# Altium PCB StuderA80ReproExtend_V0.3_XLR.PcbDoc
Units mil, origin at the board's own origin, x right, y up, seen from the top; angles counter-clockwise.
Board outline 8780 x 3200 mil, 2 copper layers (Top Layer, Bottom Layer); 11 components, 9 nets, 35 pads, 4 vias.
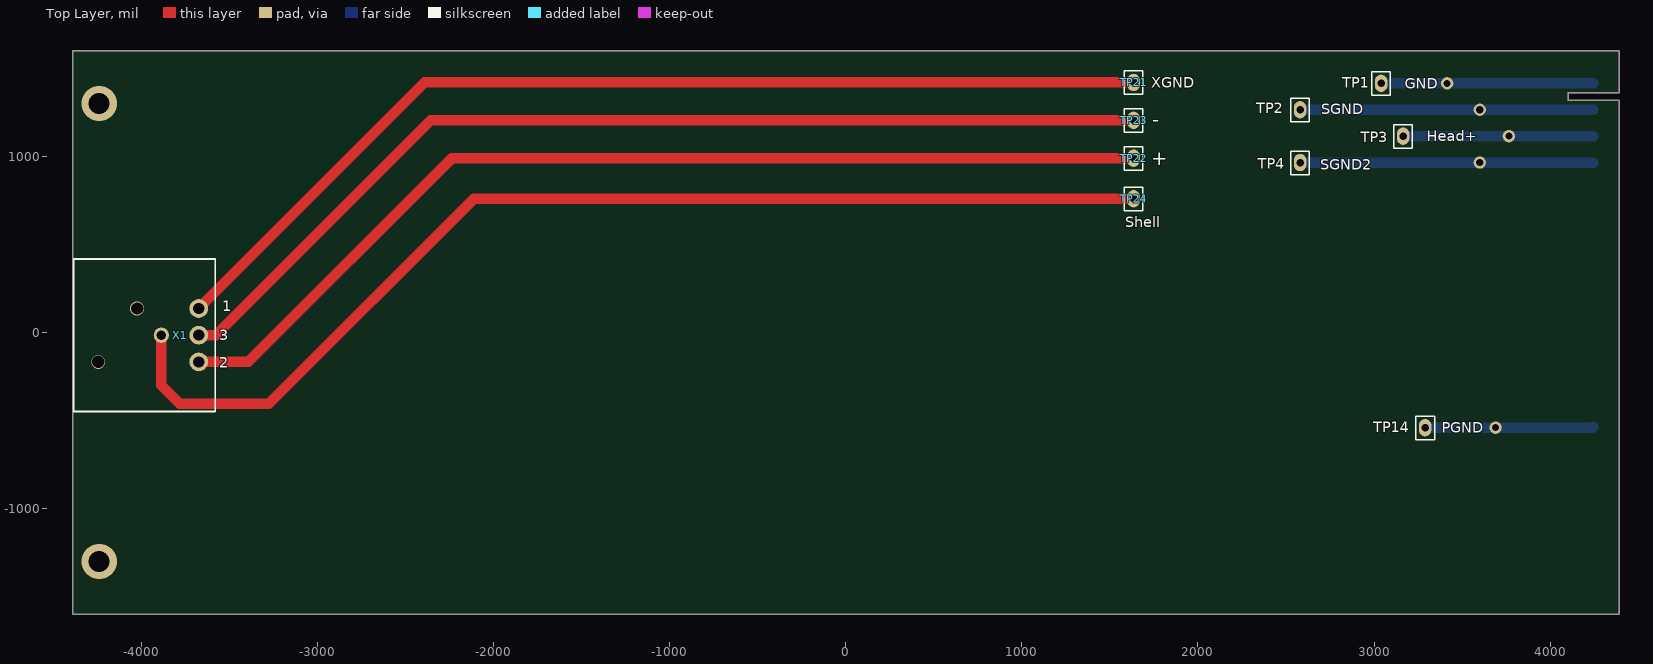
[diagram p0: Top Layer view]
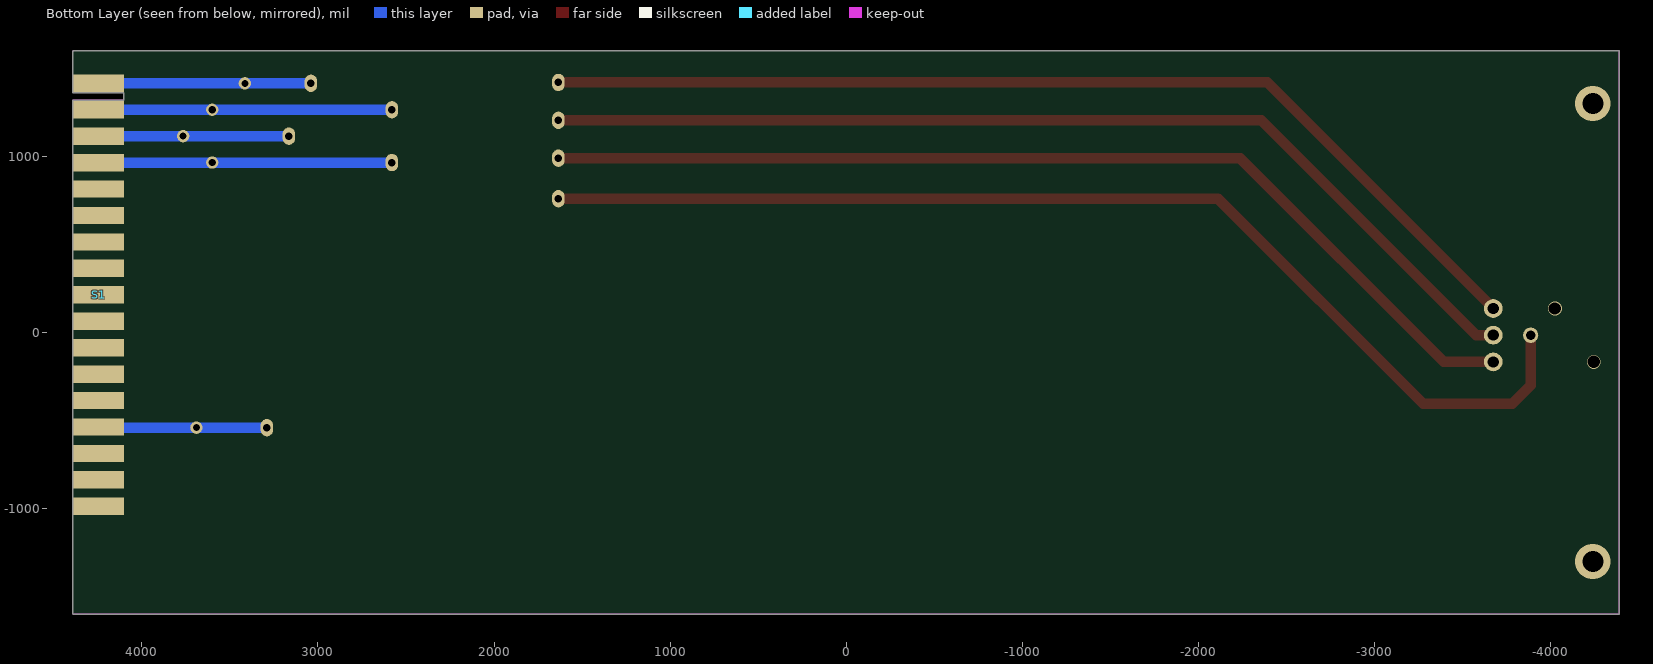
[diagram p1: Bottom Layer view, seen from below]

## Layer stack, top to bottom
Top Solder: solder mask 0.4, Solder Resist, Dk 3.5
Top Layer: signal copper 1.4
Dielectric 1: dielectric 12.6, FR-4, Dk 4.8
Bottom Layer: signal copper 1.4
Bottom Solder: solder mask 0.4, Solder Resist, Dk 3.5

## Board outline
-4388,-300 -4388,1600 4388,1600 4392,1597 4392,1360 4102,1360 4102,1320 4392,1320 4392,-1597 4388,-1600 -4388,-1600

## Design rules (kind name [scope] priority, off if disabled: settings)
Clearance [All] p1: gap=10 ignorepadtopadclearanceinfootprint=FALSE except(0: Arc-Hole Track-Hole SMDPad-Hole THPad-Hole Via-Hole Fill-Hole Poly-Hole Region-Hole Text-Hole)
PolygonConnect [All] p1: connectstyle=Relief reliefconductorwidth=10 reliefentries=4 polygonreliefangle="90 Angle" airgapwidth=10
RoomDefinition StuderA80ReproExtend_V0.3_XLR [InComponentClass('StuderA80ReproExtend_V0.3_XLR')] p1: confinementstyle=ConfineIn formatcopy=TRUE lockcomponents=FALSE outline -7997.11,-4804.51 -5997.11,-4804.51 -5997.11,-3804.51 -7997.11,-3804.51
RoutingVias [All] p1: holewidth=28 width=50 viastyle="Through Hole" minholewidth=28 minwidth=50 maxholewidth=28 maxwidth=50
SolderMaskExpansion [All] p1: expansion=4
Width [All] p1: maxlimit=200 minlimit=10 preferedwidth=60
30 further rules are at their usual default settings.

## Classes and differential pairs
component class StuderA80ReproExtend_V0.3_XLR: S1 TP1 TP2 TP3 TP4 TP14 TP21 TP22 TP23 TP24

## Components (designator, comment, footprint, x,y, rotation, side; value= is the part's Value field where it differs from the comment)
S1 "ReproInterface-1.080.986-12" ReproInterface 4245,214.21 r0 top
TP1 "GND" TP-1.0mm 3040,1415 r0 top
TP2 "SGND" TP-1.0mm 2580,1265 r0 top
TP3 "Head+" TP-1.0mm 3165,1115 r0 top
TP4 "SGND2" TP-1.0mm 2580,965 r0 top
TP14 "PGND" TP-1.0mm 3290,-540 r0 top
TP21 "XGND" TP-1.0mm 1635,1420 r0 top
TP22 "+" TP-1.0mm 1635,990 r0 top
TP23 "-" TP-1.0mm 1635,1205 r0 top
TP24 "Shell" TP-1.0mm 1635,760 r0 top
X1 "XLR_Shell" NEUTRIK-NC3FAAH-SHELL -3672.4,-15 r90 top

## Footprints (in the part's own frame and the unit in brackets; to place one, negate y for a bottom-side part, rotate by r counter-clockwise, add the part's x,y. Pads: shape width x height; smd on the part's side, far side on the other; paste and mask are expansions set on the pad)
NEUTRIK-NC3FAAH-SHELL [mm] "3pin XLR with shell pin"
  round 2.7 hole 1.6: 1(3.85,0) 2(-3.85,0) 3(0,0)
  round 2.2 hole 1.4: 4(0,5.4)
  silkscreen extent -11,-2.36 11,18.03
ReproInterface [mm] "Studer A80 RC Reproduce Card 1.080.986-12 Interface"
  rect 7.35x2.5 smd far side: 1(0,30.5) 2(0,26.688) 3(0,22.875) 4(0,19.062) 5(0,15.25) 6(0,11.438) 7(0,7.625) 8(0,3.812) 9(0,0) 10(0,-3.812) 11(0,-7.625) 12(0,-11.438) 13(0,-15.25) 14(0,-19.062) 15(0,-22.875) 16(0,-26.688) 17(0,-30.5)
TP-1.0mm [mm] "Test Point with 1.0mm hole"
  oval 1.8x2.5 hole 1.1: 1(0,0)
  silkscreen extent -1.37,-1.73 1.35,1.65

## Part data
S1: "Studer A80 RC Reproduce Card 1.080.986-12 Interface"
TP1 TP2 TP3 TP4 TP14 TP21 TP22 TP23 TP24: library part TestPoint
X1: "3 Pin XLR with Shell Pin"

## Free pads (board coordinates)
  round 70 hole 40: 4(3415,1415) 4(3600,965) 4(3690,-540) 4(3765,1115) 5(3600,1265)

## Via types
v1: diameter 78.74, hole 70.87, Top Layer to Bottom Layer, 2 vias
v2: diameter 200, hole 120, Top Layer to Bottom Layer, 2 vias

## Nets (pads, with @x,y where several pads share a name; then routed paths per layer and width w, separated by ;. In a path a pad name is that pad's centre, name@x,y a point inside that pad or via, vN(x,y) a via of type N, cw(c..) or ccw(c..) an arc to the next point about the centre after c; other vN are vias at no path point)
NetS1_1: pad.4@3415,1415 S1.1 TP1.1 | length 1205
  Bottom Layer w60: TP1.1 3415,1415 S1.1
NetS1_2: pad.5 S1.2 TP2.1 | length 1665
  Bottom Layer w60: TP2.1 pad.5 4244.9,1265 S1.2
NetS1_3: pad.4@3765,1115 S1.3 TP3.1 | length 1080.1
  Bottom Layer w60: TP3.1 3765,1115 4244.8,1115 S1.3
NetS1_4: pad.4@3600,965 S1.4 TP4.1 | length 1665.1
  Bottom Layer w60: TP4.1 2580.3,964.7 S1.4
NetS1_14: pad.4@3690,-540 S1.14 TP14.1 | length 956.5
  Bottom Layer w60: TP14.1 3690,-540 4241.26,-540 S1.14
NetTP21_1: TP21.1 X1.1 | length 5839.6
  Top Layer w60: X1.1 -3672.4,137.6 -2390,1420 TP21.1
NetTP22_1: TP22.1 X1.2 | length 5786.5
  Top Layer w60: X1.2 -3391.57,-166.57 -2235,990 TP22.1
NetTP23_1: TP23.1 X1.3 | length 5812.7
  Top Layer w60: X1.3 -3575,-15 -2355,1205 TP23.1
NetTP24_1: TP24.1 X1.4 | length 6331.1
  Top Layer w60: X1.4 -3885,-300 -3780,-405 -3275,-405 -2110,760 TP24.1
pads on no net: S1.5 S1.6 S1.7 S1.8 S1.9 S1.10 S1.11 S1.12 S1.13 S1.15 S1.16 S1.17
copper on no net:
  other v1: -4243.27,-166.57 -4022.8,136.57
  other v2: -4238,-1300 -4238,1300

## Keep-outs
Keep-Out Layer:
  lines w0.5: -4388,-1600 4388,-1600 4392,-1597 4392,1310.4 4392,1313.4 4392,1316 4392,1320 4102,1320 4102,1360 4392,1360 4392,1365 4392,1368 4392,1597 4388,1600 -4388,1600 -4388,300 -4388,-300 -4388,-1600

## Silkscreen, mask and mechanical layers (free items; w line width, h text height)
Top Overlay:
  text "1" at -3540,120 h60
  text "3" at -3555,-45 h60
  text "2" at -3555,-200 h60